# Altium PCB PCB2.PcbDoc
Units mil, origin at the board's own origin, x right, y up, seen from the top; angles counter-clockwise.
Board outline 3020 x 2140 mil, 2 copper layers (Top Layer, Bottom Layer); 32 components, 25 nets, 141 pads, 15 vias.
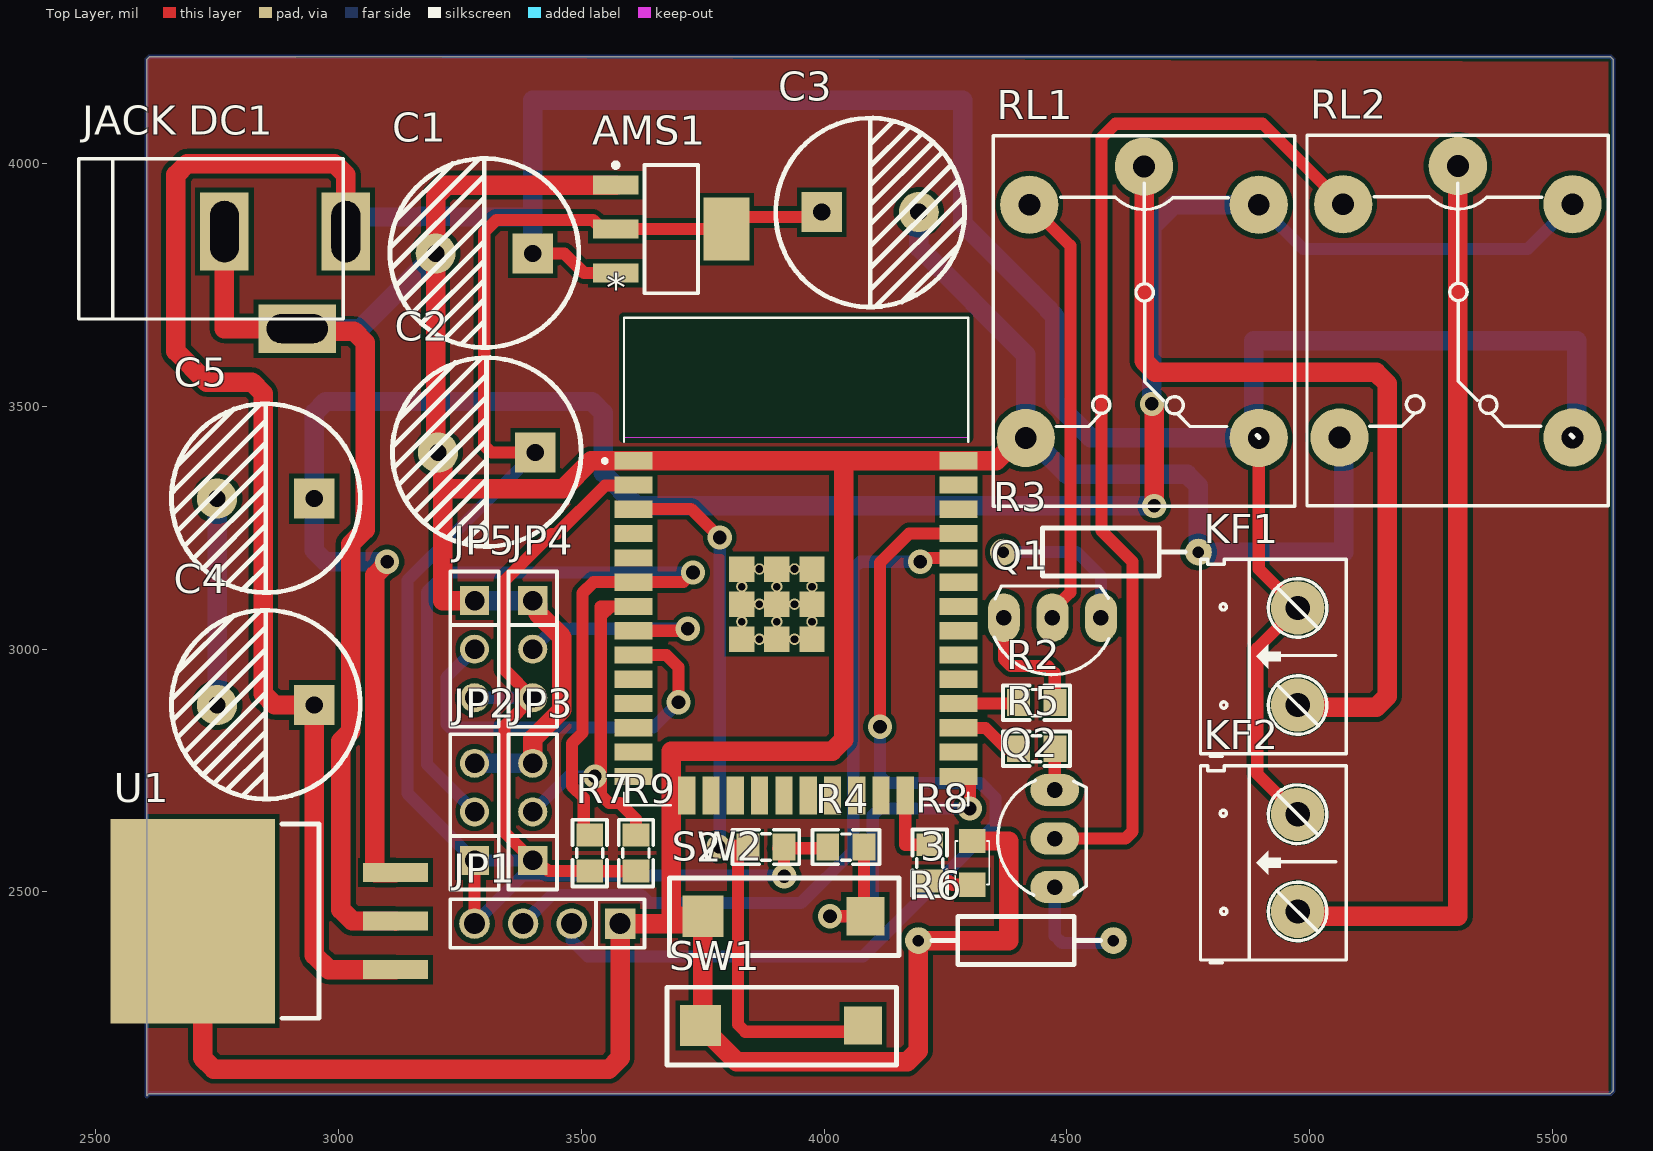
[diagram p0: Top Layer view]
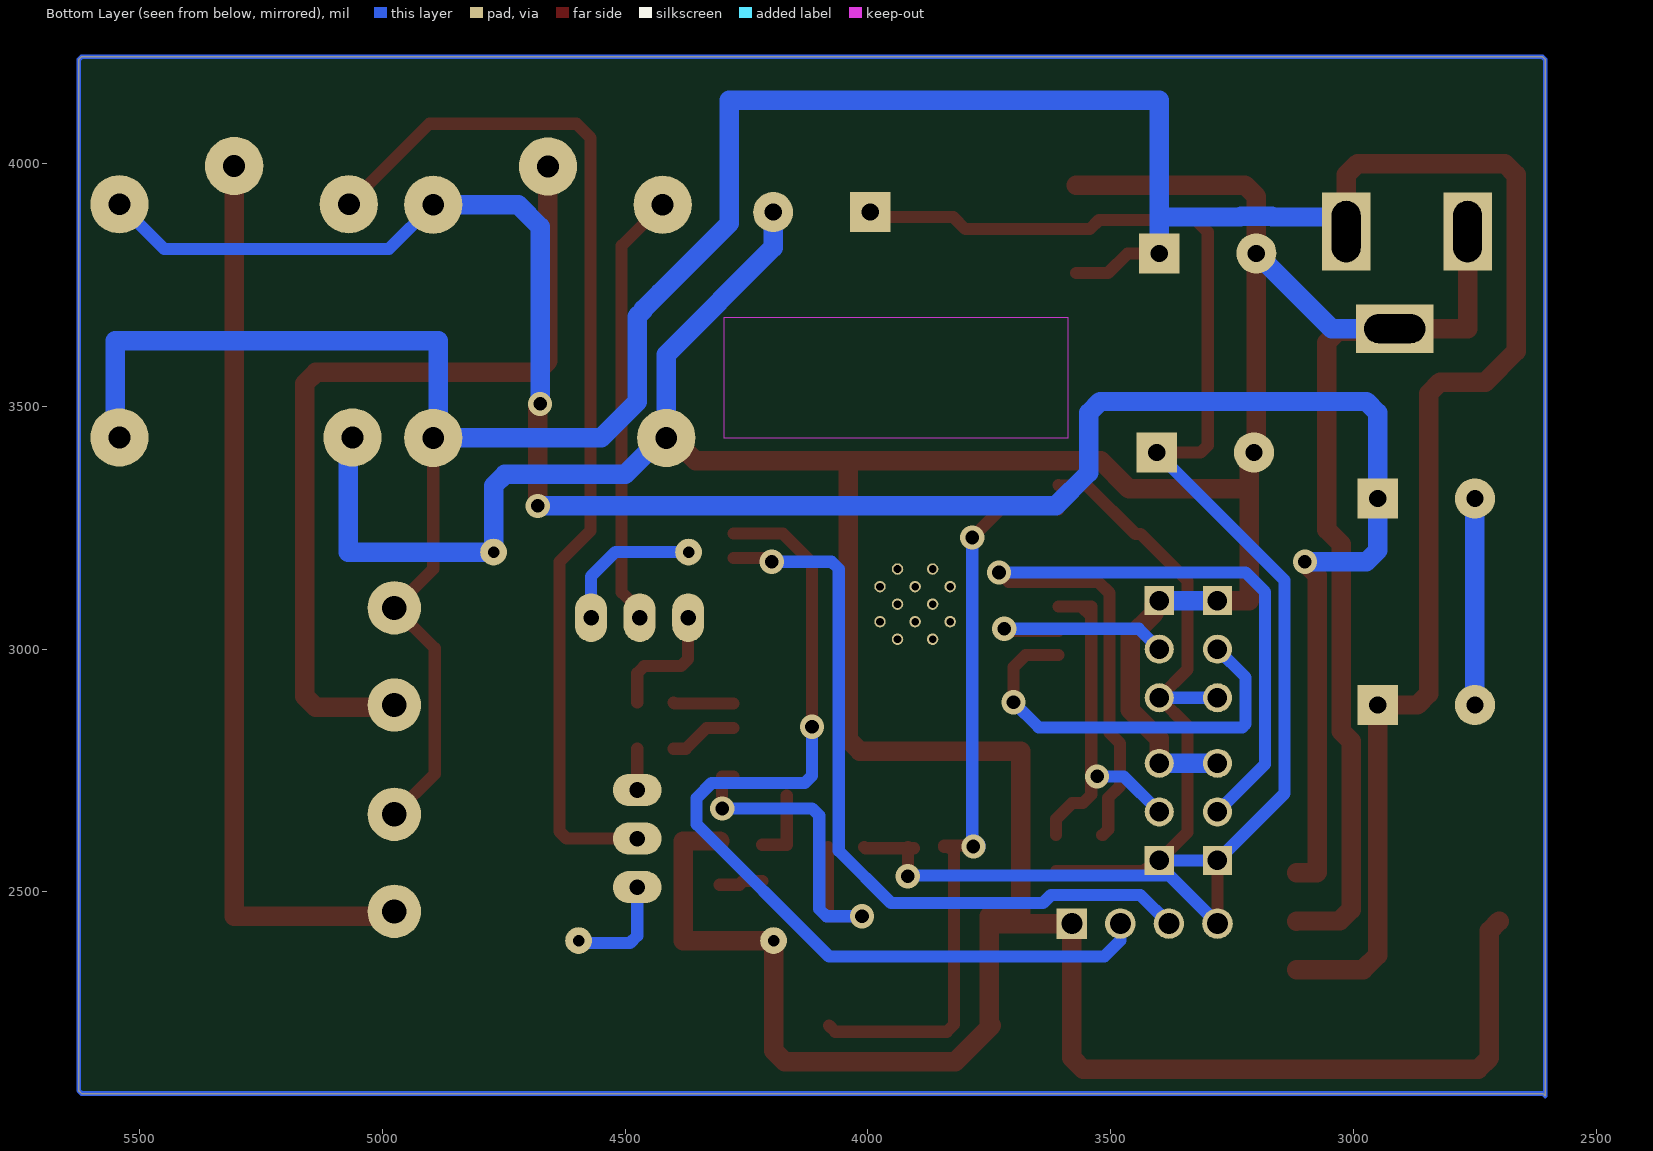
[diagram p1: Bottom Layer view, seen from below]
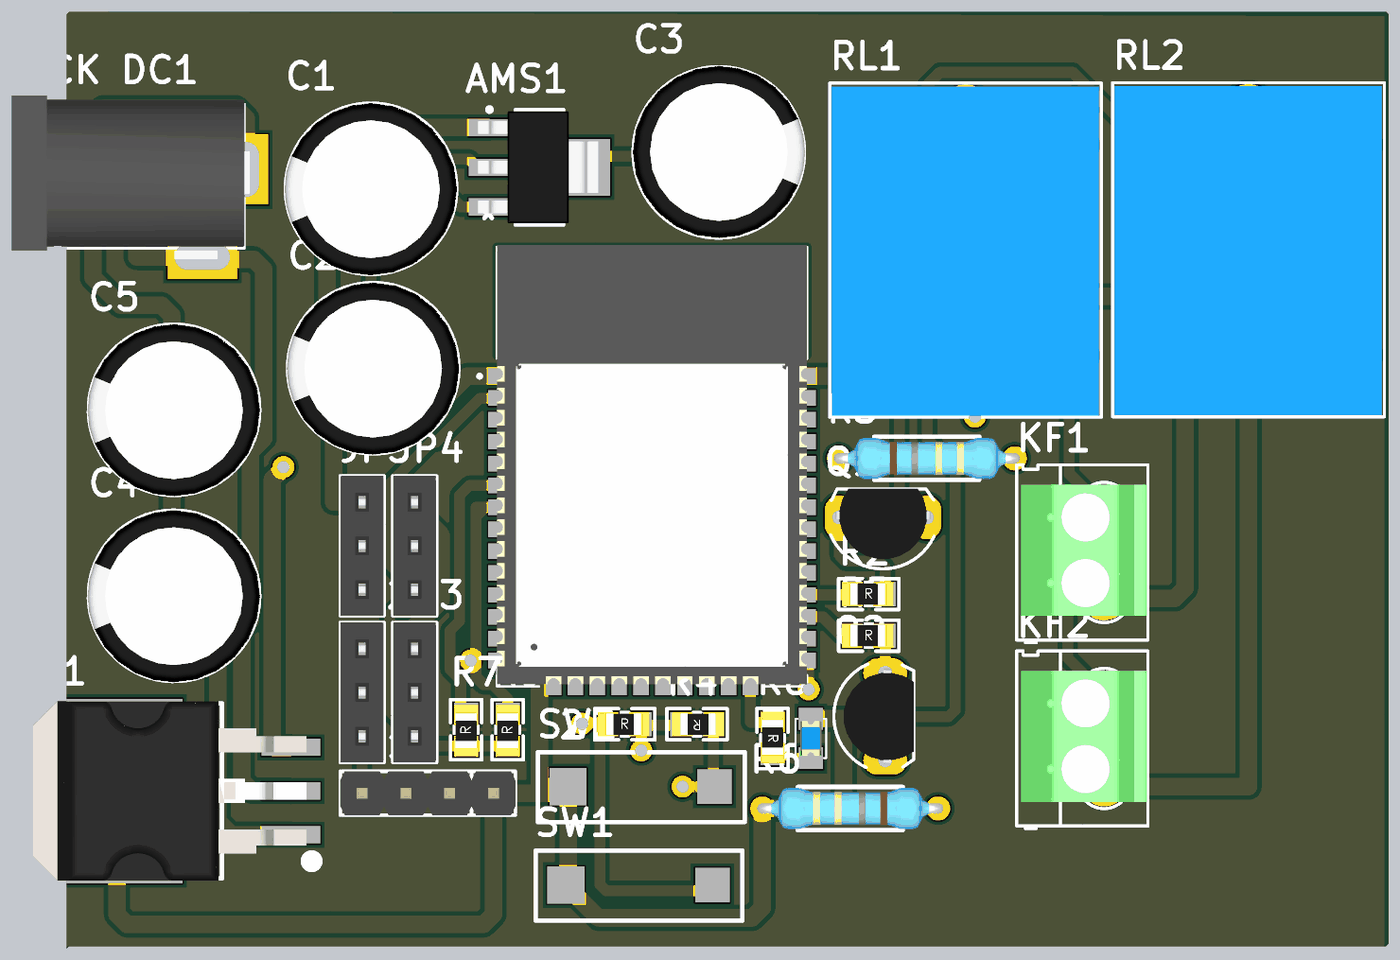
[diagram p2: 3D render of the assembled board from above, using the file's embedded part models]

## Layer stack, top to bottom
Top Solder: solder mask 0.4, Solder Resist, Dk 3.5
Top Layer: signal copper 1.4
Dielectric 1: dielectric 12.6, FR-4, Dk 4.8
Bottom Layer: signal copper 1.4
Bottom Solder: solder mask 0.4, Solder Resist, Dk 3.5

## Board outline
2605,2080 2605,4214.14 2610.86,4220 5619.14,4220 5625,4214.14 5625,2090.86 5619.14,2085 2610,2085

## Design rules (kind name [scope] priority, off if disabled: settings)
Clearance [All] p1: gap=10 ignorepadtopadclearanceinfootprint=FALSE
HoleSize [All] p1: absolutevalues=TRUE maxlimit=15.75 minlimit=11.81 maxpercent=80.000 minpercent=20.000
PolygonConnect [All] p1: connectstyle=Relief reliefconductorwidth=10 reliefentries=4 polygonreliefangle="90 Angle" airgapwidth=10
RoutingVias [All] p1: holewidth=28 width=50 viastyle="Through Hole" minholewidth=28 minwidth=50 maxholewidth=28 maxwidth=50
SolderMaskExpansion [All] p1: expansion=4 istentingtop=FALSE
Width [InNet('GND')] p1: maxlimit=50 minlimit=40 preferedwidth=40
29 further rules are at their usual default settings.

## Components (designator, comment, footprint, x,y, rotation, side; value= is the part's Value field where it differs from the comment)
2 "12k" "tro smd 0805" 3880,2595 r0 top (schematic designator R1)
3 "LED 0805" LED-0805-Blue 4305,2515 r90 top (schematic designator L1)
* "ESP32 WROOM 32" ESP32-WROOM-32D 3942.13,3180.94 r0 top
AMS1 "AMS1117-3.3V" SOT223 3685,3865 r270 top value="AMS1117-3.3V SOT223"
C1 "33uF" "tu hoa 10mm" 3300,3815 r180 top
C2 "33uF" "tu hoa 10mm" 3305,3405 r180 top
C3 "100uF" "Tu hoa 10mm" 4095,3900 r0 top
C4 "33uF" "tu hoa 10mm" 2850,2885 r180 top
C5 "33uF" "tu hoa 10mm" 2850,3310 r180 top
"JACK DC1" "JACK DC 5.5" "JACK DC 5.5" 2890,3760 r0 top value="Jac DC"
JP1 "JP 1x4 2.54" "JP 1x4 DT" 3580,2435 r180 top
JP2 "JP 1x3 2.54" "JP 1x3 CT" 3280,2565 r90 top
JP3 "JP 1x3 2.54" "JP 1x3 CT" 3400,2565 r90 top
JP4 "JP 1x3 2.54" "JP 1x3 CT" 3400,3100 r270 top
JP5 "JP 1x3 2.54" "JP 1x3 CT" 3280,3100 r270 top
KF1 "CON 2 KF301" "Con 2 KF301 5.08" 4975,2885 r90 top
KF2 "CON 2 KF301" "Con 2 KF301 5.08" 4975,2460 r90 top
Q1 "C1815" TO92 4470,3065 r180 top value=C9014
Q2 "C1815" TO92 4475,2610 r90 top value=C9014
R2 "220R" "tro smd 0805" 4437.43,2892.39 r0 top
R3 "4.7k" "tro vach 1/4w" 4570,3200 r180 top
R4 "12k" "tro smd 0805" 4045,2590 r180 top
R5 "220R" "tro smd 0805" 4437.43,2797.39 r0 top
R6 "4.7k" "tro vach 1/4w" 4395,2400 r0 top
R7 "4.7k" "tro smd 0805" 3515,2580 r90 top
R8 "470k" "tro smd 0805" 4220,2560 r270 top
R9 "4.7k" "tro smd 0805" 3610,2580 r90 top
RL1 "Relay" "Relay 5 Chan SRD" 4658.78,3994.06 r270 top
RL2 "Relay" "Relay 5 Chan SRD" 5305,3995 r270 top
SW1 "TACTILE SWITCH" SW_342_SMD 4080,2225 r0 top
SW2 "TACTILE SWITCH" SW_342_SMD 4085,2450 r0 top
U1 "L7805ABD2T-TR" D2PAK4_94.4_433_43X133_SMD 2605.51,2440 r90 top

## Footprints (in the part's own frame and the unit in brackets; to place one, negate y for a bottom-side part, rotate by r counter-clockwise, add the part's x,y. Pads: shape width x height; smd on the part's side, far side on the other; paste and mask are expansions set on the pad)
"Con 2 KF301 5.08" [mil]
  round 110 hole 50: 1(0,0) 2(200,0)
  silkscreen extent -106,-100 300,200, body extent -45,-97 255,190, height 335
D2PAK4_94.4_433_43X133_SMD [mm]
  rect 1x3.4 smd: 1(-2.54,-13) 2(0,-13) 3(2.54,-13)
  rect 10.7x8.6 smd: 2(0,-2.4)
  round 1.27 on Top Overlay: ""(-4.075,-14.2)
  silkscreen extent -5.08,-9 5.08,-7.07, body extent -5.19,-13.89 5.21,1.96, height 4.6
ESP32-WROOM-32D [mm]
  rect 2x0.9 smd: 1(-8.5,5.26) 2(-8.5,3.99) 3(-8.5,2.72) 4(-8.5,1.45) 5(-8.5,0.18) 6(-8.5,-1.09) 7(-8.5,-2.36) 8(-8.5,-3.63) 9(-8.5,-4.9) 10(-8.5,-6.17) 11(-8.5,-7.44) 12(-8.5,-8.71) 13(-8.5,-9.98) 14(-8.5,-11.25) 25(8.5,-11.25) 26(8.5,-9.98) 27(8.5,-8.71) 28(8.5,-7.44) 29(8.5,-6.17) 30(8.5,-4.9) 31(8.5,-3.63) 32(8.5,-2.36) 33(8.5,-1.09) 34(8.5,0.18) 35(8.5,1.45) 36(8.5,2.72) 37(8.5,3.99) 38(8.5,5.26)
  rect 0.9x2 smd: 15(-5.715,-12.25) 16(-4.445,-12.25) 17(-3.175,-12.25) 18(-1.905,-12.25) 19(-0.635,-12.25) 20(0.635,-12.25) 21(1.905,-12.25) 22(3.175,-12.25) 23(4.445,-12.25) 24(5.715,-12.25)
  rect 1.33x1.33 smd: 39(-2.835,-4.075) 39(-2.835,-2.24) 39(-2.835,-0.405) 39(-1,-4.075) 39(-1,-2.24) 39(-1,-0.405) 39(0.835,-4.075) 39(0.835,-2.24) 39(0.835,-0.405)
  round 0.6 hole 0.4: 39(-2.835,-3.157) 39(-2.835,-1.322) 39(-1.917,-4.075) 39(-1.917,-2.24) 39(-1.917,-0.405) 39(-1,-3.157) 39(-1,-1.322) 39(-0.082,-4.075) 39(-0.082,-2.24) 39(-0.082,-0.405) 39(0.835,-3.157) 39(0.835,-1.322)
  Keep-Out Layer region: 9,6.45 -9,6.45 -9,12.75 9,12.75
  Keep-Out Layer region: 9,6.45 -9,6.45 -9,12.75 9,12.75
  silkscreen extent -10.1,-12.75 9,12.75, body extent -9,-12.62 9,12.88, height 3.2
"JACK DC 5.5" [mil] "Jac DC input"
  rect 100x160 hole 59.06 slot 125.98 at 90 deg: 1(125,100) 2(-125,100)
  rect 160x100 hole 59.06 slot 125.98 at 0 deg: 3(25,-100)
  silkscreen extent -425,-80 120,250, body extent -410,-105 134,269, height 434
"JP 1x3 CT" [mm]
  rect 1.52x1.52 hole 1.02: 1(0,0)
  round 1.52 hole 1.02: 2(2.54,0) 3(5.08,0)
  silkscreen extent -1.52,-1.27 6.6,1.27, body extent -1.52,-1.25 6.6,1.25, height 8.51
"JP 1x4 DT" [mm] "4 pins, 1 row, straight, gold plating"
  rect 1.6x1.6 hole 1.1: 1(0,0)
  round 1.6 hole 1.1: 2(2.54,0) 3(5.08,0) 4(7.62,0)
  silkscreen extent -1.27,-1.27 8.89,1.27, body extent -1.27,-1.27 8.89,1.27, height 8.54
LED-0805-Blue [mil]
  rect 50x55 smd: 1(0,0) 2(90,0)
  silkscreen extent 0,-35 90,35, body extent 5,-25 85,25, height 43
"Relay 5 Chan SRD" [mil] "Relay SPDT, 5 pin, 10A,W 650mil, L 800mil, H 800mil"
  round 120 hole 45: 1(0,0) 2(559.06,236.22) 3(559.06,-243.78) 4(78.74,-236.22) 5(78.74,236.22)
  silkscreen extent -63,-311 700,310, body extent -55,-306 697,304, height 602
SOT223 [mm]
  rect 1x2.4 smd: 1(-2.3,-2.9) 2(0,-2.9) 3(2.3,-2.9)
  rect 3.3x2.4 smd: 4(0,2.9)
  silkscreen extent -3.47,-3.02 3.35,1.4, body extent -3.25,-3.56 3.25,3.4, height 1.68
SW_342_SMD [mm] "CASE: SMD"
  rect 2x2 smd: 1(0,0)
  rect 2.15x2.15 smd: 2(-8.5,0)
  silkscreen extent -10.25,-2.06 1.75,2, body extent -7.17,-1.79 -1.17,1.71, height 2.4
TO92 [mil] "TO-92"
  oval 66x100 hole 32: 1(-100,0) 2(0,0) 3(100,0)
  silkscreen extent -117,-65 120,118, body extent -109,-66 109,95, height 245
"tro smd 0805" [mm]
  rect 1.2x1.4 smd: 1(-0.946,-0.061) 2(0.954,-0.061)
  silkscreen extent -1.75,-0.97 1.75,0.84, body extent -1.56,-0.76 1.44,0.64, height 0.53
"tro vach 1/4w" [mm]
  round 1.4 hole 0.6: 1(-5.1,0) 2(5.1,0)
  silkscreen extent -4.39,-1.25 4.42,1.25, body extent -5.38,-1.2 5.38,1.2, height 2.41
"tu hoa 10mm" [mm]
  rect 2.1x2.1 hole 0.9: 1(-2.54,0)
  round 2.1 hole 0.9: 2(2.54,0)
  silkscreen extent -4.95,-4.96 4.93,4.92, body extent -5,-5 4.97,5, height 20.01
"Tu hoa 10mm" [mm]
  rect 2.1x2.1 hole 0.9: 1(-2.54,0)
  round 2.1 hole 0.9: 2(2.54,0)
  silkscreen extent -4.95,-4.96 4.93,4.92, body extent -5,-5 4.97,5, height 20.01

## Part data
2 R4: library part "Tro 0805 5% 12k", "Dán", Chung_Loai=Dán, Don_Vi=Con, Ma_Hang=MH005241, So_Chan=2, Ten_Linh_Kien="Trở 0805 5% 12k"
3: library part "LED 0805 Xanh Duong", "Dán", Chung_Loai=Dán, Don_Vi=Con, Ma_Hang=MH002327, Ten_Linh_Kien="LED 0805 Màu Xanh Dương (Blue)"
AMS1: library part "AMS1117 SMD", "Dán", Chung_Loai=Dán, Don_Vi=Con, Ma_Hang=MH000596
C1 C2 C4 C5: library part "Tu Hoa 33uF 200V 10x20", "Cắm", Chung_Loai=Cắm, Don_Vi=Con, Ma_Hang=MH006539, So_Chan=2, Ten_Linh_Kien="Tụ Hóa 33uF 200V 10x20MM"
C3: library part "Tu Hoa 100uF 100V 10x20", "Cắm", Chung_Loai=Cắm, Don_Vi=Con, Ma_Hang=MH003150, So_Chan=2, Ten_Linh_Kien="Tụ Hóa 100uF 100V 10x20MM"
JP1: library part "JP 1x4 2.54 Duc Thang", "Cắm", Chung_Loai=Cắm, Don_Vi=Con, Ma_Hang=MH000903, Ten_Linh_Kien="Jump Đơn Đực 2.54MM 1x40P Thẳng 11MM"
JP2 JP3 JP4 JP5: library part "JP 1x3 2.54 Cai Thang", "Cắm", Chung_Loai=Cắm, Don_Vi=Con, Ma_Hang=MH004006, Ten_Linh_Kien="Jump Đơn Cái 2.54MM 1x20P Thẳng"
KF1 KF2: "Cắm", Chung_Loai=Cắm, Don_Vi=Con, Ma_Hang=MH000987, Ten_Linh_Kien="CON 2 KF301-2P 5.08MM Xanh Dương"
Q1 Q2: library part "Trans C1815 DIP", "NPN transistor"
R2 R5: library part "Tro 0805 5% 220R", "Dán", Chung_Loai=Dán, Don_Vi=Con, Ma_Hang=MH005259, So_Chan=2, Ten_Linh_Kien="Trở 0805 5% 220R"
R3 R6: library part "Tro Vach 1/4W 5% 4.7k", "Cắm", Chung_Loai=Cắm, Don_Vi=Con, Ma_Hang=MH007317, So_Chan=2, Ten_Linh_Kien="Trở Vạch 1/4w 5% 4.7k"
R7 R9: library part "Tro 0805 5% 4.7k", "Dán", Chung_Loai=Dán, Don_Vi=Con, Ma_Hang=MH005307, So_Chan=2, Ten_Linh_Kien="Trở 0805 5% 4.7k"
R8: library part "Tro 0805 1% 470k", "Dán", Chung_Loai=Dán, Don_Vi=Con, Ma_Hang=MH005485, So_Chan=2, Ten_Linh_Kien="Trở 0805 1% 470k"
RL1 RL2: library part "Relay 5 Chan SRD", "Relay 5 Chan", Ma_Hang=MH009374, Ten="Relay 5V10A SRD-05VDC-SL-C Chính Hãng"
SW1 SW2: library part SW1_RS-282G05A3-SMRT-SMD, "Tactile Switch SPST-NO Top Actuated Surface Mount", Alternate Part Number-1=NA, Case/Package=SMD, Manufacturer="ITT C&K", Manufacturer Part Number=RS-282G05A3-SMRT, Supplier Part Number-1=RS-282G05A3-SMRT, Supplier-1="SP ROAD"
U1: library part REG_35V-5V-1.5A-7.5W-D2PAK, "Linear Voltage Regulator IC 1 Output 1.5A D2PAK", Alternate Part Number-1=NA, Case/Package=D2PAK, Manufacturer="Texas Instruments", Manufacturer Part Number=L7805ABD2T-TR, Supplier Part Number-1=L7805ABD2T-TR, Supplier-1="SP ROAD"

## Via types
v1: diameter 50, hole 28, Top Layer to Bottom Layer, 15 vias

## Nets (pads, with @x,y where several pads share a name; then routed paths per layer and width w, separated by ;. In a path a pad name is that pad's centre, name@x,y a point inside that pad or via, vN(x,y) a via of type N, cw(c..) or ccw(c..) an arc to the next point about the centre after c; other vN are vias at no path point)
#EN: 2.1 *.3 SW1.1 | length 1546.4
  Top Layer w25: *.3 3608.46,3289.02 3725.98,3289.02 v1(3785,3230) ; v1(3782.57,2593.61) 3784.57,2595.61 3835.45,2595.61 3842.77,2595.61 2.1 ; 2.1@3830.2,2590 3822.88,2582.68 3822.88,2226.77 3837.52,2212.12 4067.12,2212.12 SW1.1
  Bottom Layer w25: v1@3770,2591 3770,2597.76 3785,2612.76 v1(3785,3230)
+3.3: 2.2 *.2 AMS1.2 AMS1.4 C2.1 C3.1 JP1.4 JP2.1 JP3.1 JP4.3 JP5.3 R4.2 R7.1 R9.1 | length 4700.3
  Top Layer w25: JP1.4 JP2.1 ; C2.1 3314.64,3405 3300,3419.64 3300,3859 3325,3884 3524,3884 3543,3865 AMS1.2 AMS1.4 3824.17,3890 3985,3890 C3.1 ; *.2 3606.18,3336.73 3548.66,3336.73 3448.91,3236.99 3438.26,3236.99 3342,3140.73 3342,2958 JP4.3 3342,2842 3342,2623 JP3.1 3417.42,2547.58 3427.66,2547.58 3432.07,2543.17 3516.99,2543.17 R7.1 R9.1 ; 2.2@3905,2590 4005.03,2590 R4.2 ; v1(3917.57,2532.61) 2.2
  Bottom Layer w25: JP1.4 3379,2534 v1@3905,2534 ; JP5.3 JP4.3 ; JP3.1 JP2.1 3142,2703 3142,3142 C2.1
+5: C5.1 RL1.5 RL2.5 U1.3 | length 4574.3
  Top Layer w40: v1(3100,3180) 3100,3177.29 3075,3152.29 3075,2540.31 3075.31,2540 U1.3 ; v1(4675,3505) 4675,3502.29 4680,3497.29 v1(4680,3295)
  Bottom Layer w25: RL1.5 4986.32,3824 5448.96,3824 RL2.5
  Bottom Layer w40: v1(3100,3180) 2973.43,3180 2950,3203.43 v1(2950,3310) 2950,3486.57 2973.43,3510 3521.57,3510 3545,3486.57 3545,3363.43 3613.43,3295 v1(4680,3295) ; v1(4675,3505) 4675,3870 4720.32,3915.32 RL1.5
+12: "JACK DC1.1" AMS1.3 C1.1 C4.1 KF1.2 KF2.2 RL1.2 RL2.2 U1.1 | length 7396.6
  Top Layer w25: C1.1 3465,3815 3505.55,3774.45 AMS1.3 ; RL1.2 4895,3165 KF1.2 4892,3002 4892,2743 KF2.2
  Top Layer w40: 3015,3860 3015,3976.57 2991.57,4000 2688.43,4000 2665,3976.57 2665,3613.43 2728.43,3550 2821.57,3550 2845,3526.57 2845,2908.43 2868.43,2885 C4.1 2950,2370 2980,2340 U1.1
  Bottom Layer w40: 3015,3860 3015,3890 3167.04,3890 3168.38,3891.34 3231.62,3891.34 3232.96,3890 3400,3890 ; C1.1 3400,3890 ; RL1.2 RL1.2@4885,3435 ; RL2.2 5550,3435.94 5550,3635 4885,3635 RL1.2@4885,3435 ; 3400,3890 3400,4130 4285,4130 4285,3877.18 4428.59,3733.59 4462.5,3699.68 4462.5,3697.5 4475,3685 4475,3510 4474.68,3509.68 4549.35,3435 RL1.2@4885,3435
DHT11: *.7 JP3.2 R9.2 | length 784.3
  Top Layer w25: v1(3528,2738) v1@3540,2750 ; *.7 3560.03,3088.03 ; R9.2 3612.39,2650 3579.39,2683 3557.39,2683 3540,2700.39 v1@3540,2750 ; v1@3540,2750 3540,3068 ; 3540,3068 3560.03,3088.03 ; 3540,3068 3540,3088.03 3560.03,3088.03
  Bottom Layer w25: JP3.2 3473,2738 v1(3528,2738)
DS18B20: *.6 JP2.2 R7.2 | length 1826.4
  Top Layer w25: R7.2 3516.12,2617.57 3505,2628.7 3505,2693.82 3480.5,2718.32 3480.5,2806 3502.42,2827.92 3502.42,3115.45 3525,3138.03 *.6 3710.03,3138.03 v1(3730,3158)
  Bottom Layer w25: JP2.2 3182,2763 3182,3118 3222,3158 v1(3730,3158)
GND: 3.2 "JACK DC1.2" "JACK DC1.3" *.1 *.15 *.38 AMS1.1 C1.2 C2.2 C3.2 JP1.1 JP2.3 JP3.3 JP4.1 JP5.1 R3.1 R6.1 RL1.3 RL2.3 SW1.2 SW2.2 U1.2 | length 11328.5
  Top Layer w40: U1.2@2700,2440 2720,2420 2720,2158.43 2743.43,2135 3556.57,2135 3580,2158.43 JP1.1 SW2.2@3750.35,2435 ; 2765,3860 2765,3660 2915,3660 2920,3655 3031.57,3655 3055,3631.57 3055,3246.14 3025,3216.14 3025,2830.71 3005,2810.71 3005,2463.75 3028.43,2440.31 3117.01,2440.31 U1.2@3117.32,2440 ; JP5.1 3215,3100 3215,3330 ; JP3.3 3400,2815.26 3459.92,2875.18 3459.92,3024.82 3409.92,3074.82 3409.92,3090.08 JP4.1 ; AMS1.1 3223.43,3955.55 3200,3932.12 C1.2 3200,3405 C2.2 3215,3405 3215,3330 ; 3.2 4380,2605 4380,2400 R6.1 4194.21,2173.43 4170.78,2150 3820.35,2150 SW1.2 3750.35,2225 SW2.2@3750.35,2435 ; RL1.3 4401.58,3435 4354.61,3388.03 4040,3388.03 ; 3215,3330 3462.17,3330 3520.21,3388.03 *.1 4040,3388.03 ; SW2.2@3750.35,2435 SW2.2 3685,2450 3685,2790 4016.57,2790 4040,2813.43 4040,3388.03
  Bottom Layer w40: 2915,3660 3045,3660 C1.2 ; JP2.3 JP3.3 ; JP5.1 JP4.1 ; C3.2 4195,3826.8 4415,3606.8 RL1.3 4425,3435 4500,3360 4747.36,3360 4770.79,3336.57 R3.1 5070,3200 5070,3435.94 RL2.3
IO0: *.25 R4.1 SW2.1 | length 798.6
  Top Layer w25: v1(4012,2450) SW2.1 4082.23,2452.77 R4.1 ; *.25 4300,2738.03 v1(4300,2672)
  Bottom Layer w25: v1(4012,2450) 4085.36,2450 4100,2464.64 4100,2657.36 4114.64,2672 v1(4300,2672)
IO2: *.24 R8.1 | length 151.9
  Top Layer w25: *.24 4167.13,2597.23 R8.1
LED1: *.28 R2.1 | length 124.2
  Top Layer w25: *.28 4398.23,2888.03 R2.1
LED2: *.27 R5.1 | length 141.2
  Top Layer w25: *.27 4331.97,2838.03 4375,2795 R5.1
NetC4_2: C4.2 C5.2 | length 425
  Bottom Layer w40: C4.2 C5.2
NetKF1_1: KF1.1 RL1.1 | length 1764.1
  Top Layer w40: RL1.1 4658.78,3593.43 4682.21,3570 5136.57,3570 5160,3546.57 5160,2903.43 5136.57,2880 4975,2880 KF1.1
NetKF2_1: KF2.1 RL2.1 | length 1885
  Top Layer w40: KF2.1 4975,2450 5305,2450 RL2.1
NetL1_1: 3.1 R8.2 | length 90.5
  Top Layer w25: R8.2 4257,2522.43 4264.43,2515 3.1
NetQ1_1: Q1.1 R3.2 | length 306.5
  Bottom Layer w25: R3.2 4520,3200 4570,3150 Q1.1
NetQ1_2: Q1.2 RL1.4 | length 900.6
  Top Layer w25: RL1.4 4507,3830.88 4507,3117.14 4470,3080.14 Q1.2
NetQ1_3: Q1.3 R2.2 | length 262.8
  Top Layer w25: Q1.3 4370,2979.64 4384.64,2965 4460.36,2965 4475,2950.36 R2.2
NetQ2_1: Q2.1 R6.2 | length 229.3
  Bottom Layer w25: Q2.1 4475,2409.64 4489.64,2395 4590.79,2395 R6.2
NetQ2_2: Q2.2 RL2.4 | length 2199.4
  Top Layer w25: Q2.2 4620.36,2610 4635,2624.64 4635,3180 4571,3244 4571,4053 4600,4082 4903.04,4082 RL2.4
NetQ2_3: Q2.3 R5.2 | length 85
  Top Layer w25: Q2.3 R5.2
Rx: *.35 JP1.2 | length 1970
  Top Layer w25: v1(4115,2840) 4115,3178.03 4175,3238.03 *.35
  Bottom Layer w25: JP1.2 3480,2400 3513,2367 4080,2367 4352.5,2639.5 4352.5,2693.75 4321.75,2724.5 4129.86,2724.5 4115,2739.36 v1(4115,2840)
TTP223_1: *.8 JP4.2 | length 449.6
  Top Layer w25: *.8 3715.03,3038.03 v1(3719,3042)
  Bottom Layer w25: JP4.2 3442,3042 v1(3719,3042)
TTP223_2: *.9 JP5.2 | length 855.5
  Top Layer w25: *.9 3675,2988.03 3700,2963.03 v1(3700,2890.8)
  Bottom Layer w25: JP5.2 3222,2942 3222,2846 3229,2839 3648.2,2839 v1(3700,2890.8)
Tx: *.34 JP1.3 | length 1562.3
  Top Layer w25: v1(4198,3180) 4206.03,3188.03 *.34
  Bottom Layer w25: JP1.3 3439,2494 3504.44,2494 3622.89,2494 3639.38,2477.5 3952.5,2477.5 4060,2585 4060,3165.36 4074.64,3180 v1(4198,3180)
pads on no net: *.4 *.5 *.10 *.11 *.12 *.13 *.14 *.16 *.17 *.18 *.19 *.20 *.21 *.22 *.23 *.26 *.29 *.30 *.31 *.32 *.33 *.36 *.37 *.39 U1.
copper on no net: | length 10306.8
  Bottom Layer w10: 2605,2080 2605,2085 2605,4214.14 2610.86,4220 5619.14,4220 5625,4214.14 5625,2090.86 5619.14,2085 2610,2085 2605,2080

## Polygon pours and split planes (outlines as drawn)
no net on Top Layer "NONET_L01_P000" (solid, pour order 0): 2610,4220 2605,4215 2605,2085 5620,2085 5615,2090 5615,4210

## Other copper
Bottom Layer:

## Text inside footprints (layer, text, board x,y; h text height)
*: Mechanical 13 "ANTENNA" at 3705.91,3535.28 h70